# Altium PCB PCB1.PcbDoc
Units mm, origin at the board's own origin, x right, y up, seen from the top; angles counter-clockwise.
Board outline 82.75 x 60.14 mm, 2 copper layers (Top Layer, Bottom Layer); 49 components, 20 nets, 149 pads, 115 vias.
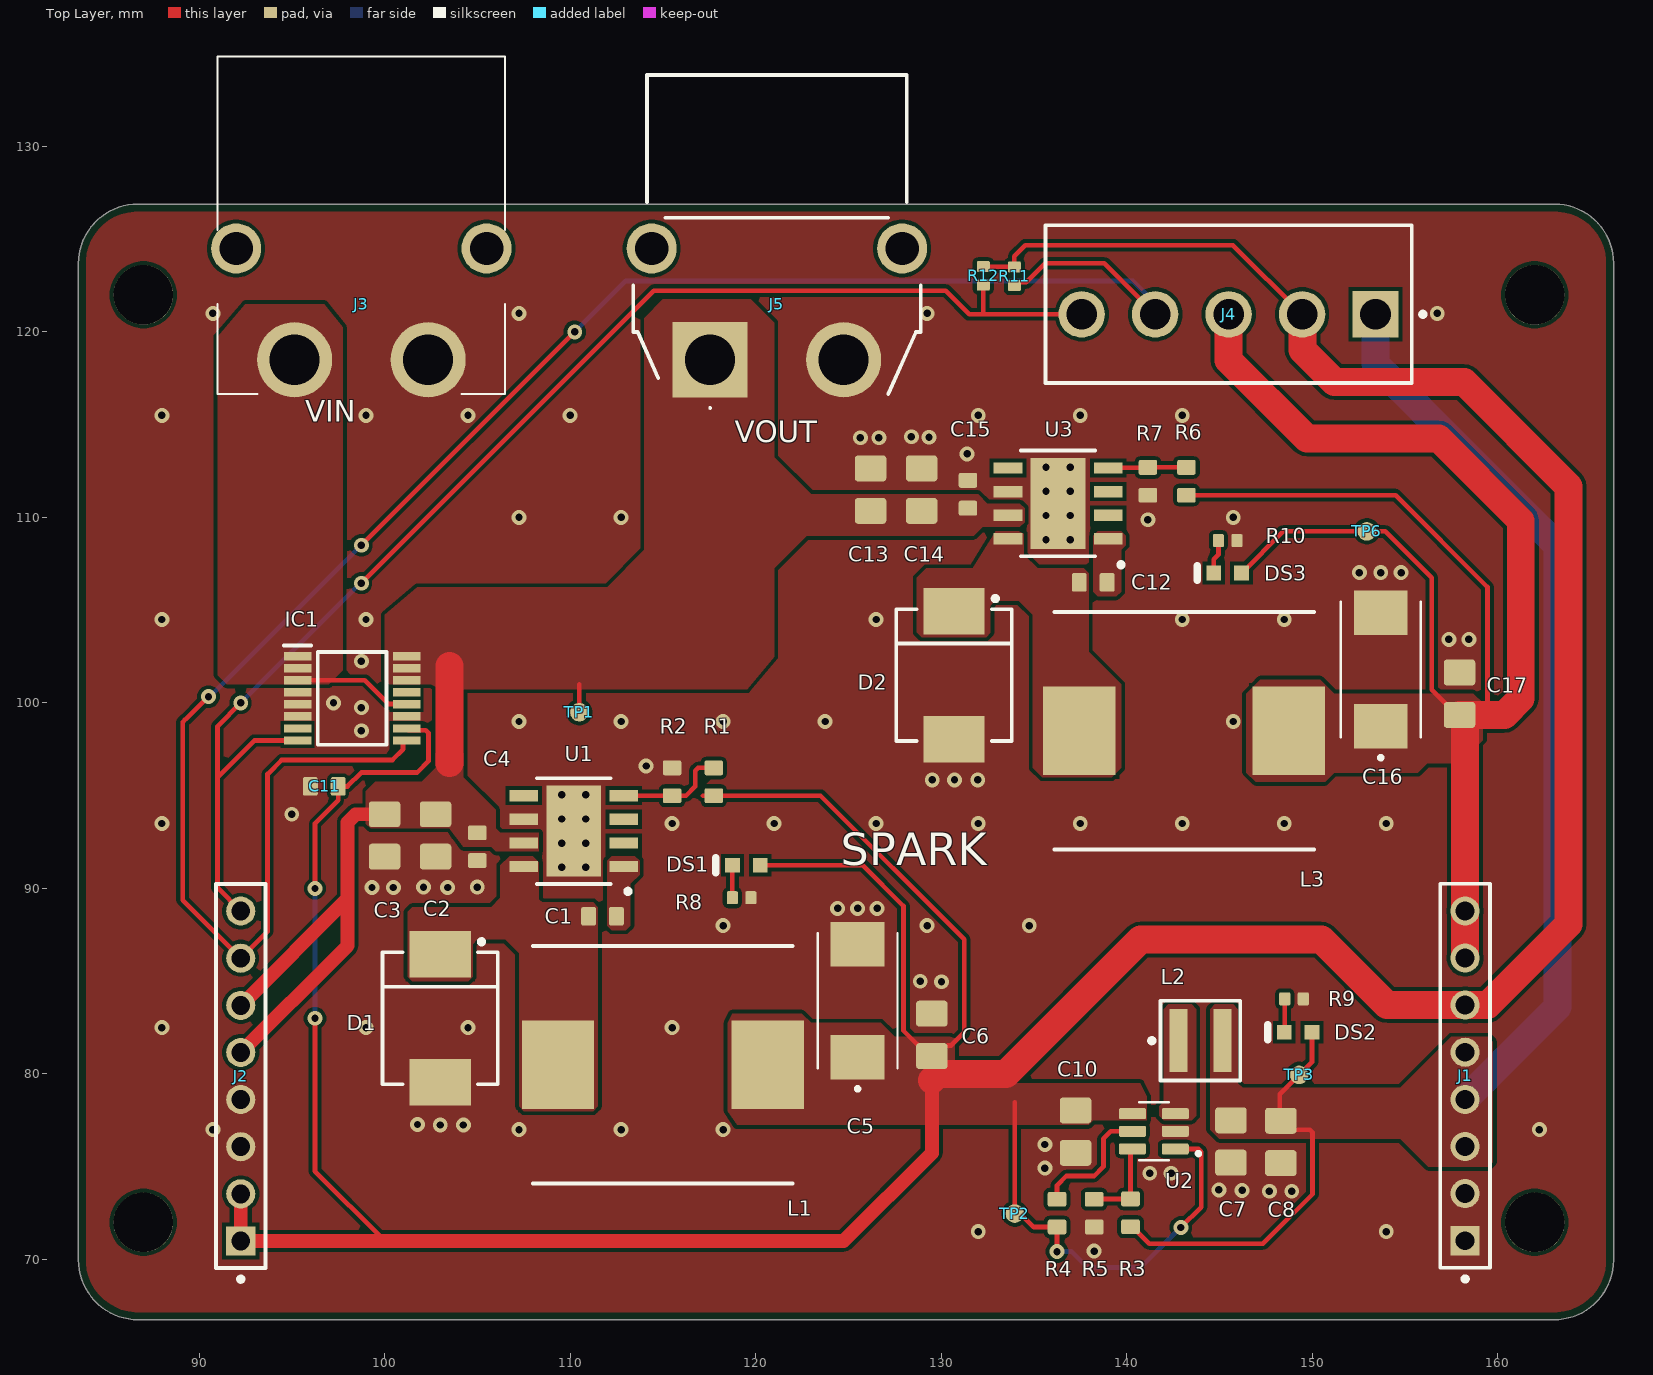
[diagram p0: Top Layer view]
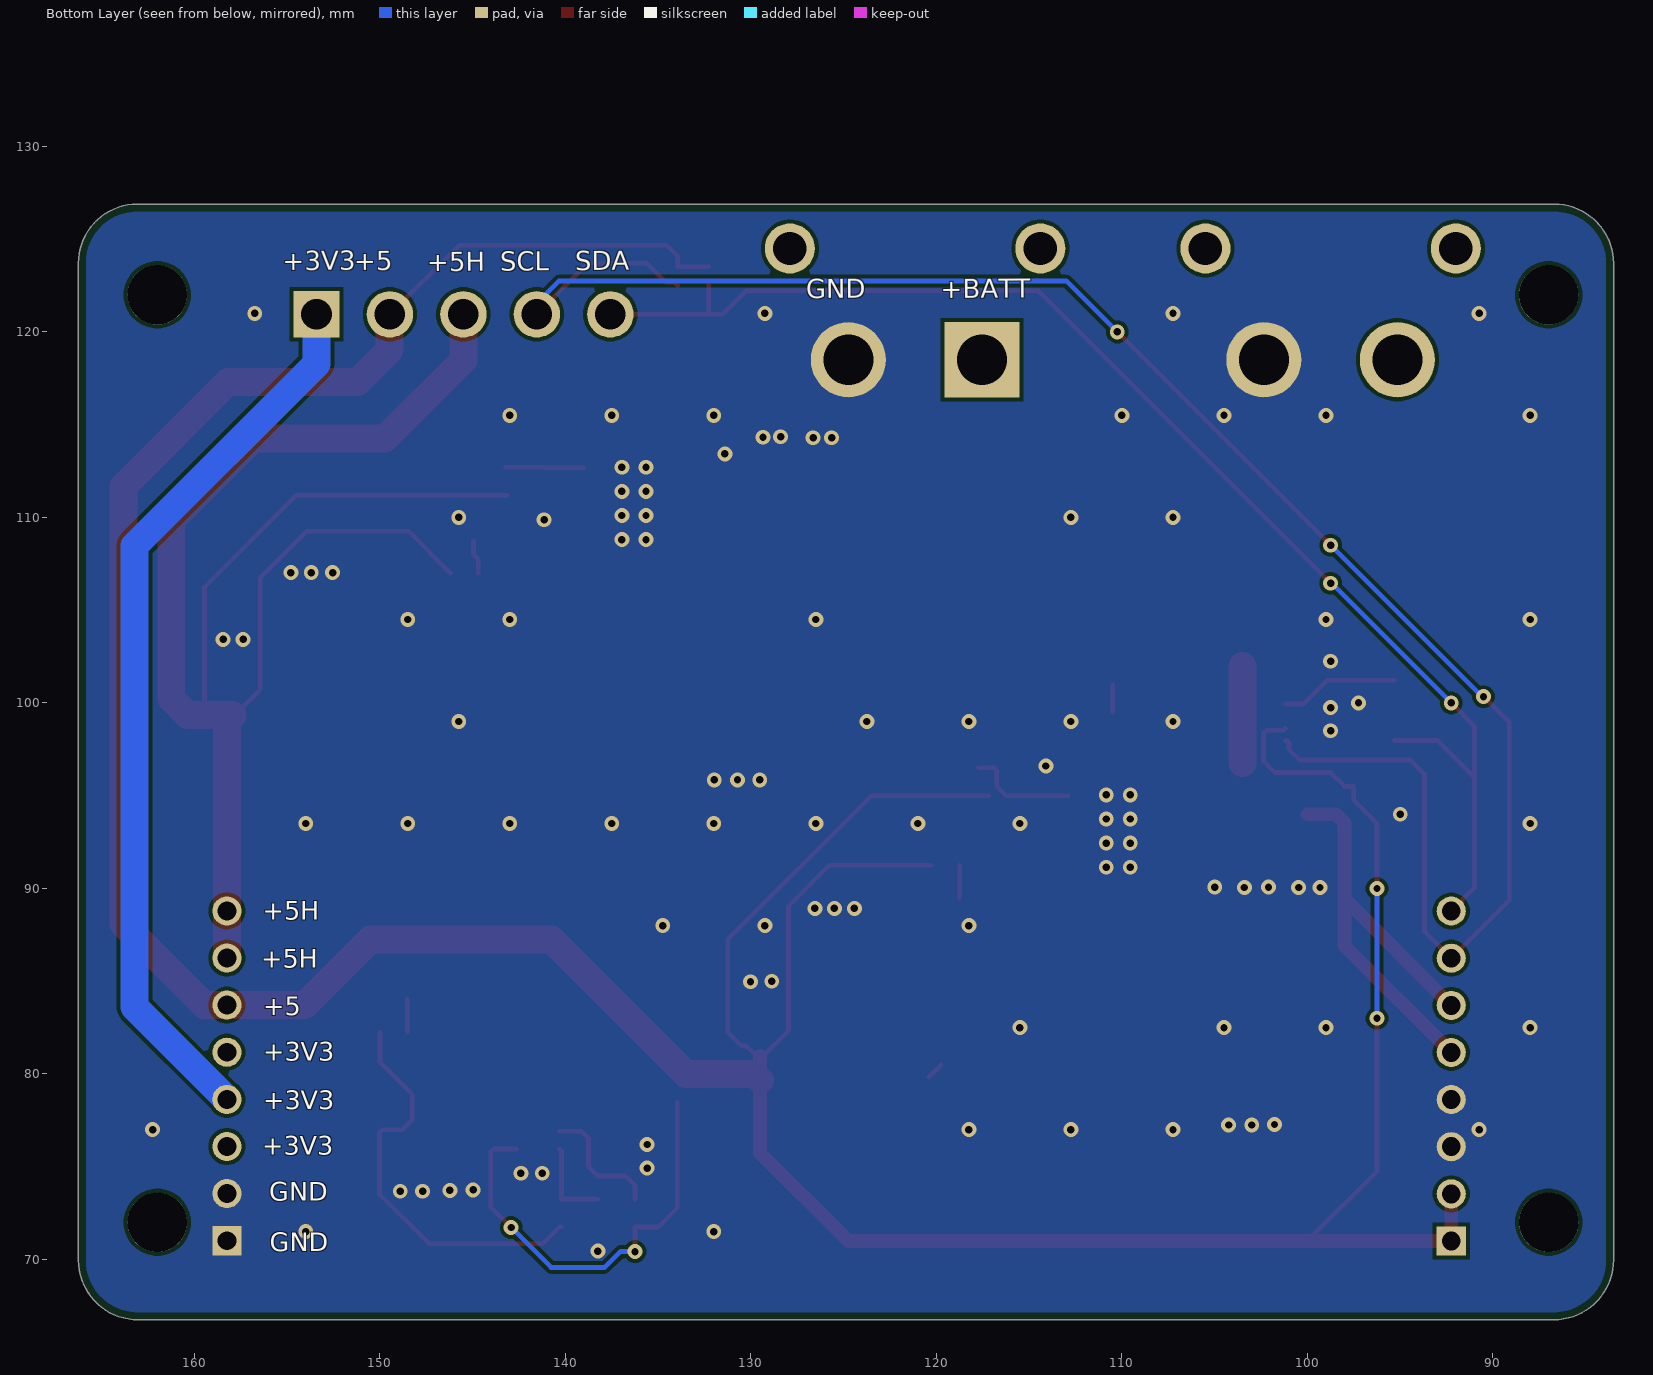
[diagram p1: Bottom Layer view, seen from below]
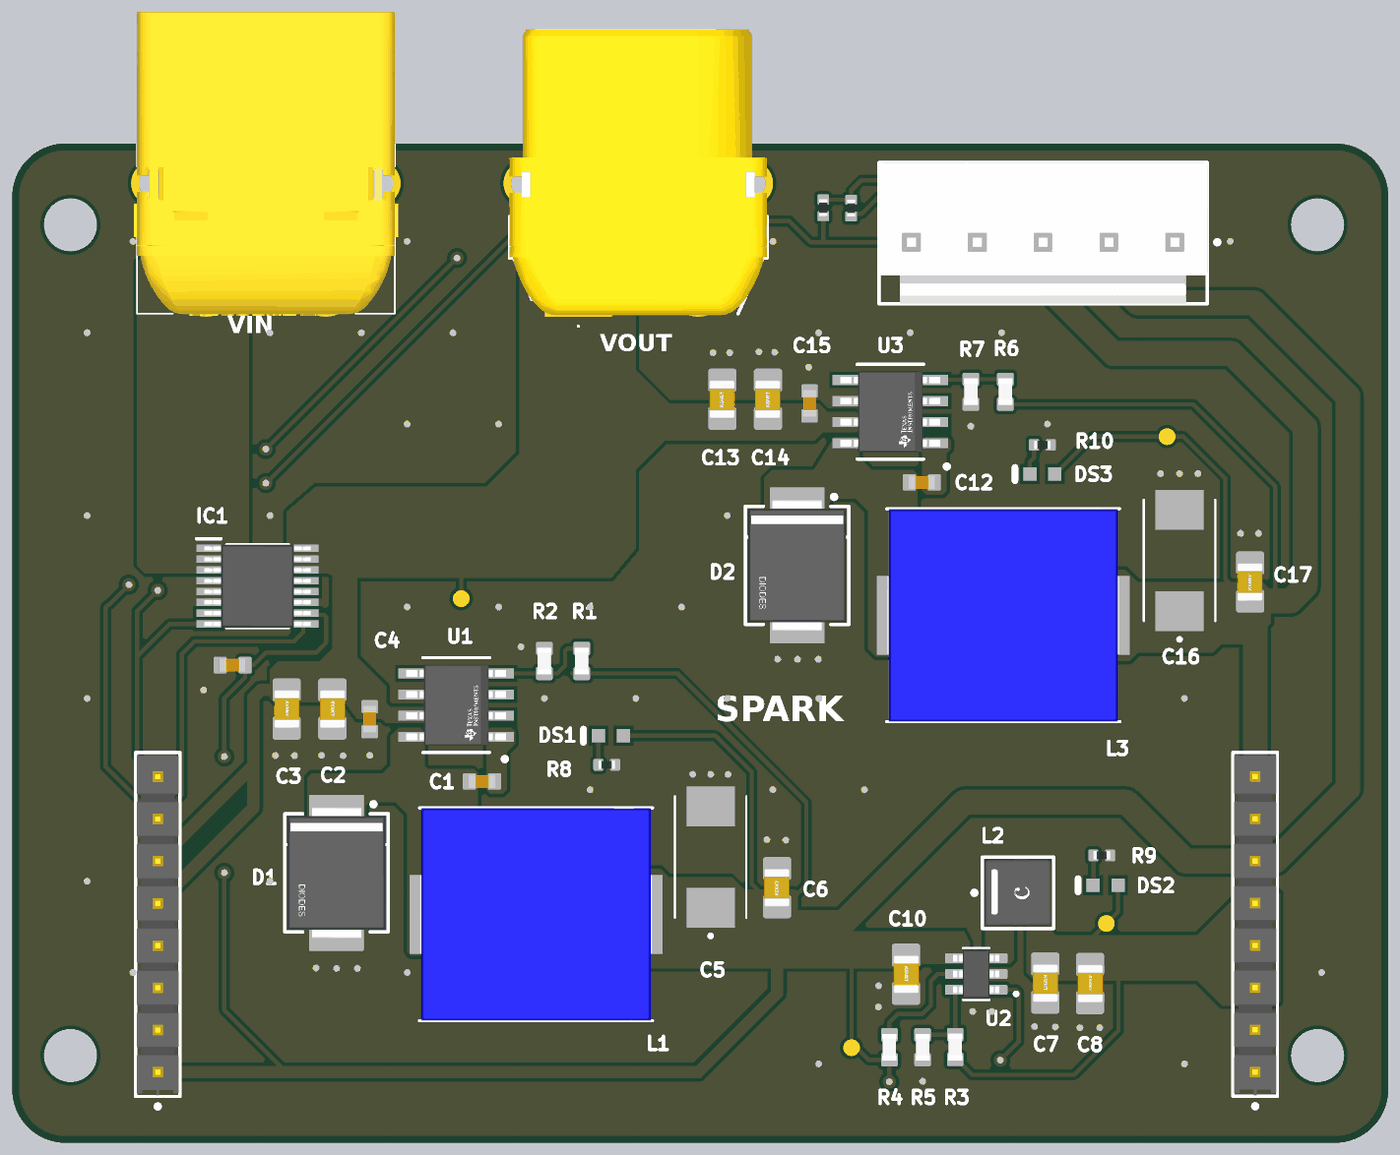
[diagram p2: 3D render of the assembled board from above, using the file's embedded part models]

## Layer stack, top to bottom
Top Solder: solder mask 0.0102, Solder Resist, Dk 3.5
Top Layer: signal copper 0.0356
Dielectric 1: dielectric 0.32, FR-4, Dk 4.8
Bottom Layer: signal copper 0.0356
Bottom Solder: solder mask 0.0102, Solder Resist, Dk 3.5

## Board outline
83.5,69.975 83.5,123.692 cw(c86.7,123.692) 86.7,126.891 163.072,126.891 cw(c163.072,123.713) 166.25,123.713 166.25,69.963 cw(c163.037,69.963) 163.037,66.75 86.725,66.75 cw(c86.725,69.975)

## Design rules (kind name [scope] priority, off if disabled: settings)
BoardOutlineClearance [All] p1: gap=0.254 ignorepadtopadclearanceinfootprint=FALSE except(0: Arc-SplitContinuation Track-SplitContinuation SMDPad-SplitContinuation THPad-SplitContinuation Via-SplitContinuation Fill-SplitContinuation Poly-SplitContinuation Region-SplitContinuation Text-SplitContinuation; 0.4: Arc-OutlineEdge Track-OutlineEdge SMDPad-OutlineEdge THPad-OutlineEdge Via-OutlineEdge Fill-OutlineEdge Poly-OutlineEdge Region-OutlineEdge Text-OutlineEdge)
Clearance [All] p1: gap=0.2 ignorepadtopadclearanceinfootprint=TRUE except(0.3: SMDPad-Via; 0.35: Arc-Via Track-Via THPad-Via Via-Via)
PolygonConnect [All] p1: connectstyle=Direct reliefconductorwidth=0.254 reliefentries=4 polygonreliefangle="90 Angle" airgapwidth=0.254
RoutingVias [All] p1: holewidth=0.4 width=0.8 viastyle="Through Hole" minholewidth=0.35 minwidth=0.55 maxholewidth=0.63 maxwidth=0.9
SolderMaskExpansion SolderMaskExpansion_Via [IsVia] p1: expansion=0 istentingtop=TRUE
SolderMaskExpansion [All] p2: expansion=0 istentingtop=FALSE
SupplyNets "Schematic Supply Nets_5" [InNet('+5H')] p1: voltage=0.000
SupplyNets "Schematic Supply Nets_4" [InNet('+BATT')] p2: voltage=0.000
SupplyNets "Schematic Supply Nets_3" [InNet('+BATT_CON')] p3: voltage=0.000
SupplyNets "Schematic Supply Nets_2" [InNet('GND')] p4: voltage=0.000
SupplyNets "Schematic Supply Nets_1" [InNet('+5')] p5: voltage=0.000
SupplyNets "Schematic Supply Nets" [InNet('+3V3')] p6: voltage=0.000
UnRoutedNet [All] p1: checkbadconnections=TRUE
Width [All] p1: maxlimit=2 minlimit=0.254 preferedwidth=0.254 minimp=50.000000 maximp=50.000000 favimp=50.000000
29 further rules are at their usual default settings.

## Classes and differential pairs
component class Sheet2: DS1 DS2 DS3 J3 R8 R9 R10
component class Power: C1 C2 C3 C4 C5 C6 C7 C8 C10 C11 C12 C13 C14 C15 C16 C17 D1 D2 IC1 J1 J2 J4 J5 L1 L2 L3 R1 R2 R3 R4 R5 R6 R7 R12 TP1 TP2 TP3 TP6 U1 U2 U3

## Components (designator, comment, footprint, x,y, rotation, side; value= is the part's Value field where it differs from the comment)
C1 "100n" CAP_0603 111.75,88.5 r0 top
C2 "4u7" CAP_0805 102.75,92.857 r270 top
C3 "4u7" CAP_0805 100,92.857 r270 top
C4 "10n" CAP_0603 105,92.25 r90 top
C5 "10TPB330M" CAP_10TPB330M 125.5,83.95 r90 top
C6 "100n" CAP_0805 129.5,82.107 r90 top
C7 "C0805" CAP_0805 145.625,76.36 r270 top
C8 "C0805" CAP_0805 148.317,76.335 r270 top
C10 "C0805" CAP_0805 137.25,76.893 r270 top
C11 "100n" CAP_0603 96.75,95.5 r0 top
C12 "100n" CAP_0603 138.2,106.5 r0 top
C13 "C0805" CAP_0805 126.2,111.5 r90 top
C14 "C0805" CAP_0805 128.95,111.5 r90 top
C15 "10n" CAP_0603 131.45,111.25 r270 top
C16 "10TPB330M" CAP_10TPB330M 153.7,101.8 r90 top
C17 "C0805" CAP_0805 157.95,100.5 r90 top
D1 "B540C-13-F" FP-SMC-MFG 103,83 r270 top value=300pF
D2 "B540C-13-F" FP-SMC-MFG 130.7,101.5 r270 top value=300pF
DS1 "HSMH-C190" AVAG-HSMX-C190_V 119.5,91.25 r180 top
DS2 "HSMH-C190" AVAG-HSMX-C190_V 149.25,82.25 r180 top
DS3 "HSMH-C190" AVAG-HSMX-C190_V 145.45,107 r180 top
IC1 "INA260AIPWR" SOP65P640X120-16N 98.25,100.25 r0 top
J1 "TSW-108-08-G-S" FP-TSW-108-08-G-S-MFG 158.25,79.9 r90 top
J2 "TSW-108-08-G-S" FP-TSW-108-08-G-S-MFG 92.25,79.89 r90 top
J3 "XT60PW-M" XT60PWM 98.75,118.5 r0 top
J4 "B5P-VH-B(LF)(SN)" FP-B5P-VH-B_LF_SN-MFG 145.5,121.5 r180 top
J5 "XT60PW-F" XT60PWF 117.55,118.5 r0 top
L1 "PA4343.153NLT" INDPM140128X650N 115,80.5 r0 top
L2 "XAL4020-222MEC" FP-XAL4020-MFG 143.983,81.796 r0 top
L3 "PA4343.153NLT" INDPM140128X650N 143.1,98.5 r0 top
R1 "R0603" RES_0603 117.75,95.75 r270 top
R2 "R0603" RES_0603 115.5,95.75 r270 top
R3 "R0603" RES_0603 140.211,72.515 r270 top
R4 "R0603" RES_0603 136.25,72.5 r270 top
R5 "R0603" RES_0603 138.25,72.5 r90 top
R6 "R0603" RES_0603 143.225,111.95 r270 top
R7 "R0603" RES_0603 141.15,111.95 r90 top
R8 "R0402" RES_0402 119.25,89.5 r0 top
R9 "R0402" RES_0402 149.025,84.05 r0 top
R10 "R0402" RES_0402 145.45,108.75 r0 top
R11 "DNP" RES_0402 133.95,123 r270 top
R12 "DNP" RES_0402 132.275,123.025 r270 top
TP1 "TEST_POINT_RND_1MM" PAD_RND_1MM 110.5,99.5 r90 top
TP2 "TEST_POINT_RND_1MM" PAD_RND_1MM 133.975,72.475 r90 top
TP3 "TEST_POINT_RND_1MM" PAD_RND_1MM 149.3,79.95 r90 top
TP6 "TEST_POINT_RND_1MM" PAD_RND_1MM 152.95,109.25 r90 top
U1 "TPS5450DDAR" FP-DDA0008J-MFG 110.2,93.095 r180 top
U2 "TLV62569PDDCR" SOT95P280X110-6N 141.471,76.909 r180 top
U3 "TPS5450DDAR" FP-DDA0008J-MFG 136.308,110.753 r180 top

## Footprints (in the part's own frame and the unit in brackets; to place one, negate y for a bottom-side part, rotate by r counter-clockwise, add the part's x,y. Pads: shape width x height; smd on the part's side, far side on the other; paste and mask are expansions set on the pad)
AVAG-HSMX-C190_V [mm] "SMD, 2-Leads, Body 1.6x0.8mm, Height 0.9mm"
  rect 0.8x0.8 smd: 1(-0.75,0) 2(0.75,0)
  silkscreen extent 1.65,-0.4 1.65,0.4, body extent -0.8,-0.4 0.8,0.4, height 0.9
CAP_10TPB330M [mm]
  rect 2.4x2.9 smd: 1(-3.05,0) 2(3.05,0)
  silkscreen extent -4.85,-2.15 3.65,2.15
CAP_0603 [mm]
  rrect25% 0.8x1 smd: 1(-0.75,0) 2(0.75,0)
  body extent -0.8,-0.4 0.8,0.4, height 0.51
CAP_0805 [mm]
  rrect25% 1.4x1.7 smd: 1(-1.143,0) 2(1.143,0)
  body extent -1.15,-0.76 1.15,0.79, height 1.01
FP-B5P-VH-B_LF_SN-MFG [mm]
  rect 2.5x2.5 hole 1.65 paste-2539.97 mask+0: 1(-7.92,0.55)
  round 2.5 hole 1.65 paste-2539.97 mask+0: 2(-3.96,0.55) 3(0,0.55) 4(3.96,0.55) 5(7.92,0.55)
  silkscreen extent -10.6,-4.25 9.87,4.25, body extent -9.97,-4.35 9.97,4.35, height 0.25
FP-DDA0008J-MFG [mm]
  rect 1.55x0.6 smd paste+0 mask+0: 1(-2.7,1.905) 2(-2.7,0.635) 3(-2.7,-0.635) 4(-2.7,-1.905) 5(2.7,-1.905) 6(2.7,-0.635) 7(2.7,0.635) 8(2.7,1.905)
  rect 2.95x4.9 smd paste-1000 mask-1000: 9(0,0)
  silkscreen extent -3.05,-2.85 2,3.38, body extent -3.57,-2.75 3.57,2.75, height 0.25
FP-SMC-MFG [mm]
  rect 2.5x3.3 smd paste+0 mask+0: 1(-3.45,0) 2(3.45,0)
  silkscreen extent -4.25,-3.11 3.56,3.11, body extent -4.8,-3.21 4.8,3.21, height 0.25
FP-TSW-108-08-G-S-MFG [mm]
  rect 1.57x1.57 hole 1.02 paste-2539.97 mask+0: 1(-8.89,0)
  round 1.57 hole 1.02 paste-2539.97 mask+0: 2(-6.35,0) 3(-3.81,0) 4(-1.27,0) 5(1.27,0) 6(3.81,0) 7(6.35,0) 8(8.89,0)
  silkscreen extent -11.07,-1.34 10.35,1.34, body extent -10.45,-1.44 10.45,1.44, height 0.25
FP-XAL4020-MFG [mm]
  rect 0.98x3.4 smd paste+0 mask+0: 1(-1.185,0) 2(1.185,0)
  silkscreen extent -2.75,-2.15 2.15,2.15, body extent -2.25,-2.25 2.25,2.25, height 0.25
INDPM140128X650N [mm]
  rect 3.9x4.75 smd: 1(-5.65,0) 2(5.65,0)
  silkscreen extent -7,-6.4 7,6.4, body extent -7,-6.4 7,6.4, height 6.5
PAD_RND_1MM [mm]
  round 1 smd paste-0.5 mask+0: 1(0,0)
RES_0402 [mm]
  rrect25% 0.6x0.7 smd: 1(-0.5,0) 2(0.5,0)
  body extent -0.5,-0.25 0.5,0.25, height 0.3
RES_0603 [mm]
  rrect25% 0.8x1 smd: 1(-0.75,0) 2(0.75,0)
  body extent -0.8,-0.43 0.8,0.43, height 0.52
SOP65P640X120-16N [mm]
  rect 1.475x0.45 smd: 1(-2.938,2.275) 2(-2.938,1.625) 3(-2.938,0.975) 4(-2.938,0.325) 5(-2.938,-0.325) 6(-2.938,-0.975) 7(-2.938,-1.625) 8(-2.938,-2.275) 9(2.938,-2.275) 10(2.938,-1.625) 11(2.938,-0.975) 12(2.938,-0.325) 13(2.938,0.325) 14(2.938,0.975) 15(2.938,1.625) 16(2.938,2.275)
  silkscreen extent -3.67,-2.5 1.85,2.85, body extent -3.2,-2.5 3.2,2.5, height 1.13
SOT95P280X110-6N [mm]
  rrect25% 1.45x0.59 smd: 1(-1.155,0.95) 2(-1.155,0) 3(-1.155,-0.95) 4(1.155,-0.95) 5(1.155,0) 6(1.155,0.95)
  silkscreen extent -2.5,-1.57 0.8,1.56, body extent -1.4,-1.45 1.4,1.45, height 1.1
XT60PWF [mm]
  rect 4.05x4.05 hole 2.7: 1(0,0)
  round 4.05 hole 2.7: 2(7.2,0)
  round 2.7 hole 1.8: 3(-3.15,6) 4(10.35,6)
  silkscreen extent -4.15,-2.65 11.35,15.35, body extent -4.15,-1.94 11.35,15.26, height 8.37
XT60PWM [mm]
  round 4.05 hole 2.7: 1(-3.6,0) 2(3.6,0)
  round 2.7 hole 1.8: 3(6.75,6) 4(-6.75,6)
  silkscreen extent -7.75,-1.85 7.75,16.35, body extent -7.95,-1.98 7.95,16.3, height 8.44

## Part data
C1 C4 C11 C12 C15: library part CAP_0603, "Capacitor SMD 0603"
C2 C3 C6 C7 C8 C10 C13 C14 C17: library part CAP_0805, "Capacitor SMD 0805"
C5 C16: Package=None, Availability=Unavailable, MP=10TPB330M, Price=None
D1 D2: library part CMP-2000-05097-3, "DIODE SCHOTTKY 40V 5A SMC", Capacitance=300pF, Forward Current=5A, Manufacturer="Diodes Inc.", Max Junction Temp=+150°C, Max Repetitive Reverse Voltage=40V, Max Surge Forward Current=100A, Package=SMC, Peak Reverse Current=0.5mA, Temperature="-55°C to +150°C", Temperature Range Low=-55°C, Automotive=No, Automotive Grade=NA, Category=Diode, ComponentLink2Description=Datasheet, ComponentLink2URL=https://www.diodes.com/assets/Datasheets/ds13012.pdf, Device Class L1="Discrete Semiconductors", Device Class L2=Diodes, Device Class L3="Schottky Diodes", Digikey Description="DIODE SCHOTTKY 40V 5A SMC", Footprint Url=https://www.diodes.com/assets/Package-Files/SMC.pdf, Height=2.5mm, Lead Free=Yes, Manufacturer Part Number=B540C-13-F, Mouser Description="Diode: Schottky rectifying; SMD; 40V; 5A; SMC; Package: reel, tape", Octopart=https://octopart.com/b540c-13-f-diodes+inc.-325873, Reverse Voltage=40V, RoHS=TRUE, Standoff Height=0.1mm, Temperature Range High=+150°C
DS1 DS2 DS3: library part CMP-007-00014-2, "LED Uni-Color Red, 65 mW, 20 mA, -40 to 85 degC, 2-Pin SMD, RoHS, Tape and Reel", Case/Package=0603, Colour=Red, Forward Current=20mA, Forward Voltage=1.8V, Manufacturer=Avago, Max Operating Temperature=85°C, Min Operating Temperature=-40°C, Package Description="2-Pin Surface Mount Device, Body 1.6 x 0.8 mm, Height 0.9 mm", Package Quantity=4000, Package Reference=HSMX-C190, Power=78mW, Datasheet URL=http://docs.avagotech.com/docs/AV02-0551EN, Datasheet Version=Mar-12, Illumination Colour=Red, Lens Style=Diffused, Luminous Intensity=17mcd, Manufacturer URL=http://www.avagotech.com/, Mounting Technology=SM, Nominal Vf=1.8V, Packaging=TapeandReel, Pins=2, RoHS Compliant=True, Viewing Angle=170degrees
IC1: "Integrated Circuit", Manufacturer_Name="Texas Instruments", Mouser Part Number=595-INA260AIPWR, Arrow Part Number=INA260AIPWR, Arrow Price/Stock=https://www.arrow.com/en/products/ina260aipwr/texas-instruments.html?utm_currency=USD&region=nac, Datasheet Link=http://www.ti.com/lit/gpn/INA260, Height=1.2mm, Manufacturer_Part_Number=INA260AIPWR, Mouser Price/Stock=https://www.mouser.co.uk/ProductDetail/Texas-Instruments/INA260AIPWR?qs=vcbl%252BK4rRldNzXQDYx03SQ%3D%3D
J1 J2: library part CMP-02766-000001-1, "CONN HEADER VERT 8POS 2.54MM", Manufacturer=Samtec, Temperature="-55°C to +125°C", Temperature Range High=+125°C, Temperature Range Low=-55°C, Automotive=No, Category=Conn, ComponentLink2Description=Datasheet, ComponentLink2URL=http://suddendocs.samtec.com/catalog_english/tsw_th.pdf, Conn Gender=Male, Conn Orientation=Straight, Contact Material=Gold,Nickel, Device Class L1=Connectors, Device Class L2="Headers and Wire Housings", Device Class L3=unset, Digikey Description="CONN HEADER VERT 8POS 2.54MM", Footprint Url=http://suddendocs.samtec.com/prints/tsw-xxx-xx-x-x-xx-xxx-footprint.pdf, Height=8.71mm, Lead Free=Yes, Manufacturer Part Number=TSW-108-08-G-S, Mouser Description="TSW - Samtec 2.54mm Pin Header 13.46mm Overall Pin Length 5.08mm Tail", Number of Contacts=8, Number of Rows=1, Octopart=https://octopart.com/tsw-108-08-g-s-samtec-272653, Package=TSW-108-08-G-S, Pitch=2.54mm, RoHS=TRUE
J3: "Connector", Manufacturer_Name="Changzou Amass Elec", Datasheet Link=https://www.tme.eu/Document/9b8d0c5eb7094295f3d3112c214d3ade/XT60PW%20SPEC.pdf, Height=8.4mm, Manufacturer_Part_Number=XT60PW-M
J4: library part CMP-17439-000483-1, "CONN HEADER VERT 5POS 3.96MM", Color=White, Contact Resistance=20mR, Flammability Rating="UL94 V-0", Insulation Color=Natural, Max Current Rating=10A, Max Operating Temperature=85°C, Max Voltage Rating (AC)=250V, Min Operating Temperature=-25°C, Connector Type=Header, Contact Finish - Mating=TIN, Contact Material=Brass, Contact Plating=Copper, Contact Shape=Square, Contact Type="Male Pin", Depth=8.5mm, Fastening Type=Ramp, Housing Color=White, Insulation Material=PBT, Lead Free="Lead Free", Length=19.74mm, Number of Pins=5, Number of Positions=5, Number of Rows=1, Orientation=Straight, Packaging=Bulk, Pitch=3.96mm, Series=VH, Termination=Solder, Voltage Rating=250V
J5: "Connector", Manufacturer_Name=Amass, Datasheet Link=https://www.tme.eu/Document/1191bc2fa3aee3c446e5a895fd8f7983/XT60PW-F.pdf, Height=8.4mm, Manufacturer_Part_Number=XT60PW-F
L1 L3: "Inductor", Manufacturer_Name="Yageo Group", Mouser Part Number=673-PA4343.153NLT, Arrow Part Number=PA4343.153NLT, Arrow Price/Stock=https://www.arrow.com/en/products/pa4343.153nlt/pulse-electronics-corporation, Datasheet Link=https://datasheet.datasheetarchive.com/originals/distributors/DKDS-10/182394.pdf, Height=6.5mm, Manufacturer_Part_Number=PA4343.153NLT, Mouser Price/Stock=https://www.mouser.co.uk/ProductDetail/Pulse-Electronics/PA4343153NLT?qs=%2FzQKu7YvIMa1YhPbm59etw%3D%3D
L2: library part CMP-11268-000134-1, "Fixed Inductors 2.2uH Shld 20% 5.5A 38.7mOhms AECQ2", Case/Package=SMD/SMT, DC Resistance (DCR)=38.7mR, Inductance=2.2uH, Inductance Tolerance=20%, Max DC Current=5.5A, Max Operating Temperature=125°C, Min Operating Temperature=-40°C, Package Quantity=1000, Saturation Current=5.6A, Self Resonant Frequency=52MHz, Test Frequency=100kHz, Core Material=Composite, Height=2.1mm, Lead Free="Contains Lead", Length=4.3mm, Mount="Surface Mount", Packaging="Tape and Reel", RMS Current (Irms)=5.5A, RoHS Compliant=Yes, Series=XAL4020, Shielding=Shielded, Termination=SMD/SMT, Tolerance=20%, Width=4.3mm
R1 R2 R3 R4 R5 R6 R7: library part RES_0603, "Resistor SMD 0603"
R8 R9 R10 R11 R12: library part RES_0402, "Resistor SMD 0402"
TP1 TP2 TP3 TP6: library part CMP-019-000001-1, "Test Point Round 1mm (NO BOM)", Design Item ID=TEST_POINT_RND_1MM, Source=Schematic-Lib-PhilsLab.SchLib
U1 U3: library part CMP-04918-000100-1, "IC REG BUCK ADJUSTABLE 5A 8SOPWR", Manufacturer="Texas Instruments", Max Junction Temp=+125°C, Max Supply Voltage=36V, Min Supply Voltage=5.5V, Nominal Supply Current=3mA, Output Current=5A, Output Voltage=1.22-31V, Package=DDA0008J, Switching Frequency=500kHz, Temperature="-40°C to +125°C", Temperature Range Low=-40°C, Automotive=No, Category=IC, ComponentLink2Description=Datasheet, ComponentLink2URL=https://www.ti.com/lit/ds/symlink/tps5450.pdf, Device Class L1="Integrated Circuits (ICs)", Device Class L2="Power Management ICs", Device Class L3="Voltage Regulators - Switching", Digikey Description="IC REG BUCK ADJUSTABLE 5A 8SOPWR", Height=1.7mm, Ipc Land Pattern Name=SOIC127P600X170-8, Lead Free=Yes, Manufacturer Part Number=TPS5450DDAR, Max Duty Cycle=89%, Mouser Description="Conv DC-DC 5.5V to 36V Step Down Single-Out 1.22V to 31V 5A 8-Pin HSOP EP T/R", Number Of Outputs=1, Octopart=https://octopart.com/tps5450ddar-texas+instruments-7105511, Output Type=AdjustableProgrammable, RoHS=TRUE, Standoff Height=0mm, Switching Topology=Buck, Temperature Range High=+125°C
U2: "2.5V-5.5V input, 2-A high efficiency step-down buck converter in SOT23 and SOT563 package", Package="SOT-23-THN-6 Texas Instruments", Check_prices=https://www.snapeda.com/parts/TLV62569PDDCR/Texas+Instruments/view-part/?ref=eda, MF="Texas Instruments", MP=TLV62569PDDCR, SnapEDA_Link=https://www.snapeda.com/parts/TLV62569PDDCR/Texas+Instruments/view-part/?ref=snap

## Free pads (board coordinates)
  round 3.2 hole 3.2 unplated: 0(87,72) 0(87,122) 0(162,72) 0(162,122)

## Via types
v1: diameter 0.8, hole 0.4, Top Layer to Bottom Layer, tented both sides, 99 vias
v2: diameter 0.8, hole 0.4, Top Layer to Bottom Layer, 16 vias

## Nets (pads, with @x,y where several pads share a name; then routed paths per layer and width w, separated by ;. In a path a pad name is that pad's centre, name@x,y a point inside that pad or via, vN(x,y) a via of type N, cw(c..) or ccw(c..) an arc to the next point about the centre after c; other vN are vias at no path point)
+3V3: C7.1 C8.1 DS2.1 J1.3 J1.4 J1.5 J4.1 L2.2 R3.2 TP3.1 | length 70.6
  Top Layer w0.254: R3.2 140.311,71.765 141.228,70.848 147.348,70.848 150.022,73.522 150.022,76.851 149.873,77 148.795,77 C8.1 148.25,77.545 148.25,78.9 TP3.1 150,80.65 DS2.1
  Bottom Layer w1.5: J4.1 153.42,118.28 163.225,108.475 163.225,83.605 J1.4
+5: C5.1 C6.1 C10.1 C11.2 DS1.1 IC1.10 J1.6 J2.1 J2.2 J4.2 L1.2 R1.2 R4.2 R11.1 R12.1 TP2.1 U2.1 U2.4 | length 251.6
  Top Layer w0.254: v1(96.25,83) 96.25,74.75 100,71 ; v1(96.25,90) 96.25,93.5 97.5,94.75 C11.2 98,95.5 98.75,96.25 101.75,96.25 102.372,96.872 102.372,98.378 102.223,98.527 101.286,98.527 IC1.10 ; 117.169,95 R1.2 123.5,95 131.25,87.25 131.25,82.25 130.537,81.537 130.372,81.537 130.342,81.507 130.219,81.507 129.676,80.964 C6.1 129.35,80.964 127.975,82.339 127.975,89.05 125.775,91.25 DS1.1 ; L1.2@119.75,80.5 120.2,80.05 L1.2@120.41,79.84 ; R12.1 132.288,123.512 133.937,123.512 R11.1 133.95,124.075 134.55,124.675 145.735,124.675 J4.2 ; 133.975,78.474 133.975,72.775 135,71.75 R4.2 v1(136.25,70.425) ; U2.1 143.876,75.959 144.025,75.81 144.025,72.825 v1(142.925,71.725)
  Top Layer w0.75: J2.2 J2.1 100,71 124.75,71 129.5,75.75 129.5,79.661 C6.1
  Top Layer w1.5: 129.5,79.661 129.839,80 133.5,80 140.75,87.25 150.5,87.25 154.04,83.71 J1.6 158.263,83.723 159.473,83.723 163.825,88.075 163.825,111.675 158.2,117.3 151.2,117.3 149.48,119.02 149.48,120.93 J4.2
  Bottom Layer w0.254: v1(96.25,83) v1(96.25,90) ; v1(136.25,70.425) 137.035,70.425 137.887,69.573 140.773,69.573 v1(142.925,71.725)
+5H: C16.1 C17.1 DS3.1 J1.7 J1.8 J4.3 L3.2 R6.2 TP6.1 | length 93.4
  Top Layer w0.254: R6.2@143.151,111.2 154.5,111.2 159.45,106.25 159.45,99.75 ; DS3.1 148.45,109.25 TP6.1 153.95,109.25 156.45,106.75 156.45,100.707 157.8,99.357 C17.1
  Top Layer w1.5: J4.3 145.5,118.475 149.725,114.25 156.825,114.25 161.25,109.825 161.25,100.236 160.371,99.357 C17.1 158.25,99.057 J1.8@158.25,88.809 ; J1.7 J1.8
+BATT: C2.1 C3.1 C4.2 C13.1 C14.1 C15.2 IC1.14 IC1.15 IC1.16 J2.5 J2.6 J5.1 TP1.1 U1.7 U3.7 | length 32.2
  Top Layer w0.254: TP1.1 110.5,101
  Top Layer w0.75: J2.5@91.975,80.885 98,86.91 98,89.45 ; J2.6 98,89.45 ; C3.1 98.439,94 98,93.561 98,89.45
  Top Layer w1.5: 103.5,96.75 103.5,102
+BATT_CON: IC1.1 IC1.2 IC1.3 IC1.12 J3.1 | length 6.4
  Top Layer w0.254: IC1.3 98.935,101.225 100.218,99.942 101.171,99.942 IC1.12
GND: C2.2 C3.2 C4.1 C5.2 C6.2 C7.2 C8.2 C10.2 C11.1 C13.2 C14.2 C15.1 C16.2 C17.2 D1.2 D2.2 IC1.4 IC1.5 IC1.6 IC1.11 J1.1 J1.2 J2.3 J2.4 J3.2 J5.2 R2.1 R5.1 R7.1 R8.2 R9.2 R10.2 U1.6 U1.9 U2.2 U3.6 U3.9
  other v1: 138.25,70.45 132,71.5 154,71.5 147.7,73.675 148.9,73.675 146.225,73.725 144.975,73.75 141.25,74.65 142.4,74.65 135.6,74.925 135.6,76.2 90.75,77 107.25,77 112.75,77 118.25,77 162.25,77 103,77.25 104.25,77.25 101.775,77.275 88,82.5 99,82.5 104.5,82.5 115.5,82.5 130.025,84.975 128.875,85 118.25,88 129.25,88 134.75,88 124.425,88.925 125.5,88.925 126.55,88.925 99.325,90.05 100.475,90.05 103.4,90.05 102.1,90.075 105,90.075 88,93.5 115.5,93.5 121,93.5 126.5,93.5 132,93.5 137.5,93.5 143,93.5 148.5,93.5 154,93.5 95,94 129.525,95.85 130.725,95.85 131.975,95.85 114.1,96.6 98.75,98.5 107.25,99 112.75,99 118.25,99 123.75,99 145.75,99 98.75,99.75 97.25,100 98.75,102.25 157.375,103.425 158.45,103.425 88,104.5 99,104.5 126.5,104.5 143,104.5 148.5,104.5 152.55,107.025 152.55,107.025 153.7,107.025 154.8,107.025 141.15,109.875 107.25,110 112.75,110 145.75,110 131.4,113.425 125.65,114.3 126.65,114.3 129.35,114.325 128.4,114.35 88,115.5 99,115.5 104.5,115.5 110,115.5 132,115.5 137.5,115.5 143,115.5 90.75,121 107.25,121 129.25,121 156.75,121
  other v2: 109.55,91.145 110.85,91.145 109.55,92.445 110.85,92.445 109.55,93.745 110.85,93.745 109.55,95.045 110.85,95.045 135.658,108.803 136.958,108.803 135.658,110.103 136.958,110.103 135.658,111.403 136.958,111.403 135.658,112.703 136.958,112.703
MCU_: IC1.8 J2.8 J4.5 R12.2 | length 74.1
  Top Layer w0.254: J2.8 91,90.03 91,96 ; v1(92.25,100) 91,98.75 91,96 ; IC1.8 92.975,97.975 91,96 ; v1(98.75,106.452) 114.523,122.225 130.25,122.225 131.525,120.95 132.225,120.95 ; R12.2 132.275,121 132.225,120.95 ; J4.5 132.225,120.95
  Bottom Layer w0.254: v1(92.25,100) 98.75,106.5 v1(98.75,106.452)
MCU_SCL: IC1.9 J2.7 J4.4 R11.2 | length 105.6
  Top Layer w0.254: v1(90.509,100.34) 89.286,99.118 89.266,99.118 89.118,98.969 89.118,89.372 J2.7 93.693,87.683 93.693,96.168 94.45,96.925 100.425,96.925 101,97.5 101,97.877 101.098,97.975 IC1.9 ; v1(98.75,108.5) v1(110.25,120) ; R11.2 134.123,122.673 134.598,122.673 135.625,123.7 138.79,123.7 J4.4
  Bottom Layer w0.254: v1(90.509,100.34) 90.59,100.34 v1(98.75,108.5) ; v1(110.25,120) 113,122.75 140.343,122.75 141.54,121.553 J4.4
NetC1_1: C1.1 D1.1 L1.1 U1.8
NetC1_2: C1.2 U1.1
NetC12_1: C12.1 D2.1 L3.1 U3.8
NetC12_2: C12.2 U3.1
NetDS1_2: DS1.2 R8.1 | length 1.7
  Top Layer w0.254: R8.1 DS1.2
NetDS2_2: DS2.2 R9.1 | length 1.8
  Top Layer w0.254: DS2.2 148.525,82.275 R9.1
NetDS3_2: DS3.2 R10.1 | length 1.9
  Top Layer w0.254: DS3.2 144.7,107.75 144.95,108 R10.1
NetL2_1: L2.1 U2.3
NetR1_1: R1.1 R2.2 U1.4 | length 6
  Top Layer w0.254: U1.4 R2.2 116.25,95 116.75,95.5 116.75,96.351 116.899,96.5 R1.1
NetR3_1: R3.1 R5.2 U2.6 | length 4.8
  Top Layer w0.254: R5.2 138.258,73.258 140.203,73.258 R3.1 ; R3.1@140.111,73.265 R3.1 ; U2.6 140.211,75.853 R3.1
NetR4_1: R4.1 U2.5 | length 6.9
  Top Layer w0.254: R4.1 136.25,74 136.75,74.5 138.25,74.5 138.75,75 138.75,76.5 139.159,76.909 U2.5
NetR6_1: R6.1 R7.2 U3.4 | length 4.2
  Top Layer w0.254: U3.4 139.029,112.679 141.129,112.679 R7.2 R6.1
pads on no net: IC1.7 IC1.13 J3.3 J3.4 J5.3 J5.4 U1.2 U1.3 U1.5 U3.2 U3.3 U3.5

## Polygon pours and split planes (outlines as drawn)
NetC12_1 on Top Layer "Top Layer-NetC12_1" (solid, pour order 178): 134.95,96.5 135.45,96 139.2,96 139.7,96.5 139.7,101 137.95,102.75 137.95,107 137.7,107.25 135.2,107.25 134.45,108 134.45,109.125 134.2,109.25 132.95,109.25 131.7,107.25 129.2,107.25 128.7,106.75 128.7,103.8 128.95,103.55 132.425,103.55 132.65,103.775 132.65,105.25 132.9,105.5 134.2,105.5 134.95,104.75 134.95,100.75
+BATT on Top Layer "Top Layer-+BATT" (solid, pour order 171): 99,93.5 99.25,93.25 103.5,93.25 103.825,92.8 104.25,92.25 105.75,92.25 106,92 108.325,92 108.325,93 106.25,93 106,93.25 106,94.25 104.25,96 104.25,97.25 102.75,97.25 102.75,96.5 102,95.75 99.5,95.75 99,95.25
+5H on Top Layer "Top Layer-+5H" (solid, pour order 174): 146.45,96.25 146.95,95.75 150.7,95.75 151.2,96.25 155.7,96.25 156.2,96.75 157.95,96.75 159.2,98 159.2,100 158.7,100.5 151.2,100.5 150.45,101.25 147.2,101.25 146.45,100.5
+3V3 on Top Layer "Top Layer-+3V3" (solid, pour order 173): 154.75,76.5 156.25,75 159.5,75 159.75,75.25 159.75,81.75 159.5,82 157.5,82 154.75,79.25 146.25,79.25 146,79.5 146,83.5 145.75,83.75 144.75,83.75 144.5,83.5 144.5,77 145,76.5
+5 on Top Layer "Top Layer-+5" (solid, pour order 172): 138.2,77.5 141.1,77.5 141.1,78.8 140.75,79.5 130.75,79.5 130.75,81.917 130.5,82 127.5,82 126.75,82.75 123,82.75 122.5,83.25 118.75,83.25 118.5,82.75 118.5,78 119,77.25 137.95,77.25
NetC1_1 on Top Layer "Top Layer-NetC1_1" (solid, pour order 163): 106.5,87.25 107.25,86.5 107.25,78.25 107.5,78 111.25,78 111.5,78.25 111.5,89 111.25,89.25 108.5,89.25 108.325,89.425 108.325,91.425 108,91.75 106.75,91.75 106.25,91.25 106.25,89.5 105.75,89 101.5,89 101.25,88.75 101.25,85.25 101.5,85 104.5,85 104.75,85.25 104.75,87 105,87.25
+BATT on Top Layer "Top Layer-+BATT 1" (solid, remove dead copper, pour order 167): 100,101.25 100.25,101 102.5,101 103,100.75 119.542,100.75 121,102.5 121,107.25 122.75,109 131.75,109 132.25,109.5 134.25,109.5 134.5,109.75 134.5,110.5 134.25,110.75 132.5,110.75 132,111.25 123,111.25 121,113.25 121,120.5 119.75,121.75 115,121.75 114,120.75 114,108.25 112,106.25 101.75,106.25 100,104.75 100,102.75
+BATT_CON on Top Layer "Top Layer-+BATT_CON" (solid, remove dead copper, pour order 166): 97,101 97.75,101.75 97.75,120.25 96.75,121.5 92.5,121.5 91,119.75 91,101.5 91.5,101 94.3,101
GND on Top Layer "GND_L01_P159" (solid, remove dead copper, pour order 159): 82.75,127.5 82.75,66.75 166.25,66.75 166.25,127.5
NetC12_2 on Top Layer "NETC12_2_L01_P109" (solid, pour order 109): 138.45,109.25 138.2,109 138.2,106 138.45,105.75 139.45,105.75 139.7,106 139.7,108.25 139.95,108.5 139.95,109 139.7,109.25
NetL2_1 on Top Layer "NETL2_1_L01_P085" (solid, pour order 85): 141.75,77.75 142,77.5 143.5,77.5 143.75,77.75 143.75,83.5 143.5,83.75 142.25,83.75 142,83.5 142,78.5 141.75,78.25
NetC1_2 on Top Layer "NETC1_2_L01_P051" (solid, pour order 51): 112.25,91.75 112,91.5 112,88 112.25,87.75 113,87.75 113.25,88 113.25,90.25 113.75,90.75 113.75,91.5 113.5,91.75
GND on Bottom Layer "GND_L02_P160" (solid, pour order 160): 82.1,127.887 82.1,65.5 167.6,65.5 167.6,127.913

## Silkscreen, mask and mechanical layers (free items; w line width, h text height)
Top Overlay:
  text "VIN" at 95.738,114.749 h2
  text "VOUT" at 118.886,113.649 h2
  text "SPARK" at 124.588,90.671 h3
Bottom Overlay:
  text "SDA" at 139.462,122.983 h1.75 r359.66
  text "+5" at 151.387,122.983 h1.75 r359.66
  text "+3V3" at 155.237,122.983 h1.75 r359.66
  text "SCL" at 143.512,122.958 h1.75 r359.66
  text "+5H" at 147.437,122.933 h1.75 r359.66
  text "+BATT" at 119.781,121.455 h1.75 r359.66
  text "GND" at 127.031,121.455 h1.75 r359.66
  text "+5H" at 156.305,88.32 h1
  text "+5H" at 156.405,85.72 h1
  text "+5" at 156.28,83.17 h1
  text "+3V3" at 156.28,80.72 h1
  text "+3V3" at 156.28,78.095 h1
  text "+3V3" at 156.33,75.645 h1
  text "GND" at 155.955,73.17 h1
  text "GND" at 155.93,70.445 h1
Mechanical 1:
  lines w0.254: 83.5,69.975 ccw(c86.725,69.975) 86.725,66.75 163.037,66.75 ccw(c163.037,69.963) 166.25,69.963 166.25,123.713 ccw(c163.072,123.713) 163.072,126.891 86.7,126.891 ccw(c86.7,123.692) 83.5,123.692 83.5,86.5 83.5,69.975